# Altium PCB EmphaseMainBoard.PcbDoc (part 1 of 2)
Units mm, origin at the board's own origin, x right, y up, seen from the top; angles counter-clockwise.
Board outline 150 x 110 mm, 2 copper layers (Top Layer, Bottom Layer); 138 components, 156 nets, 586 pads, 141 vias.
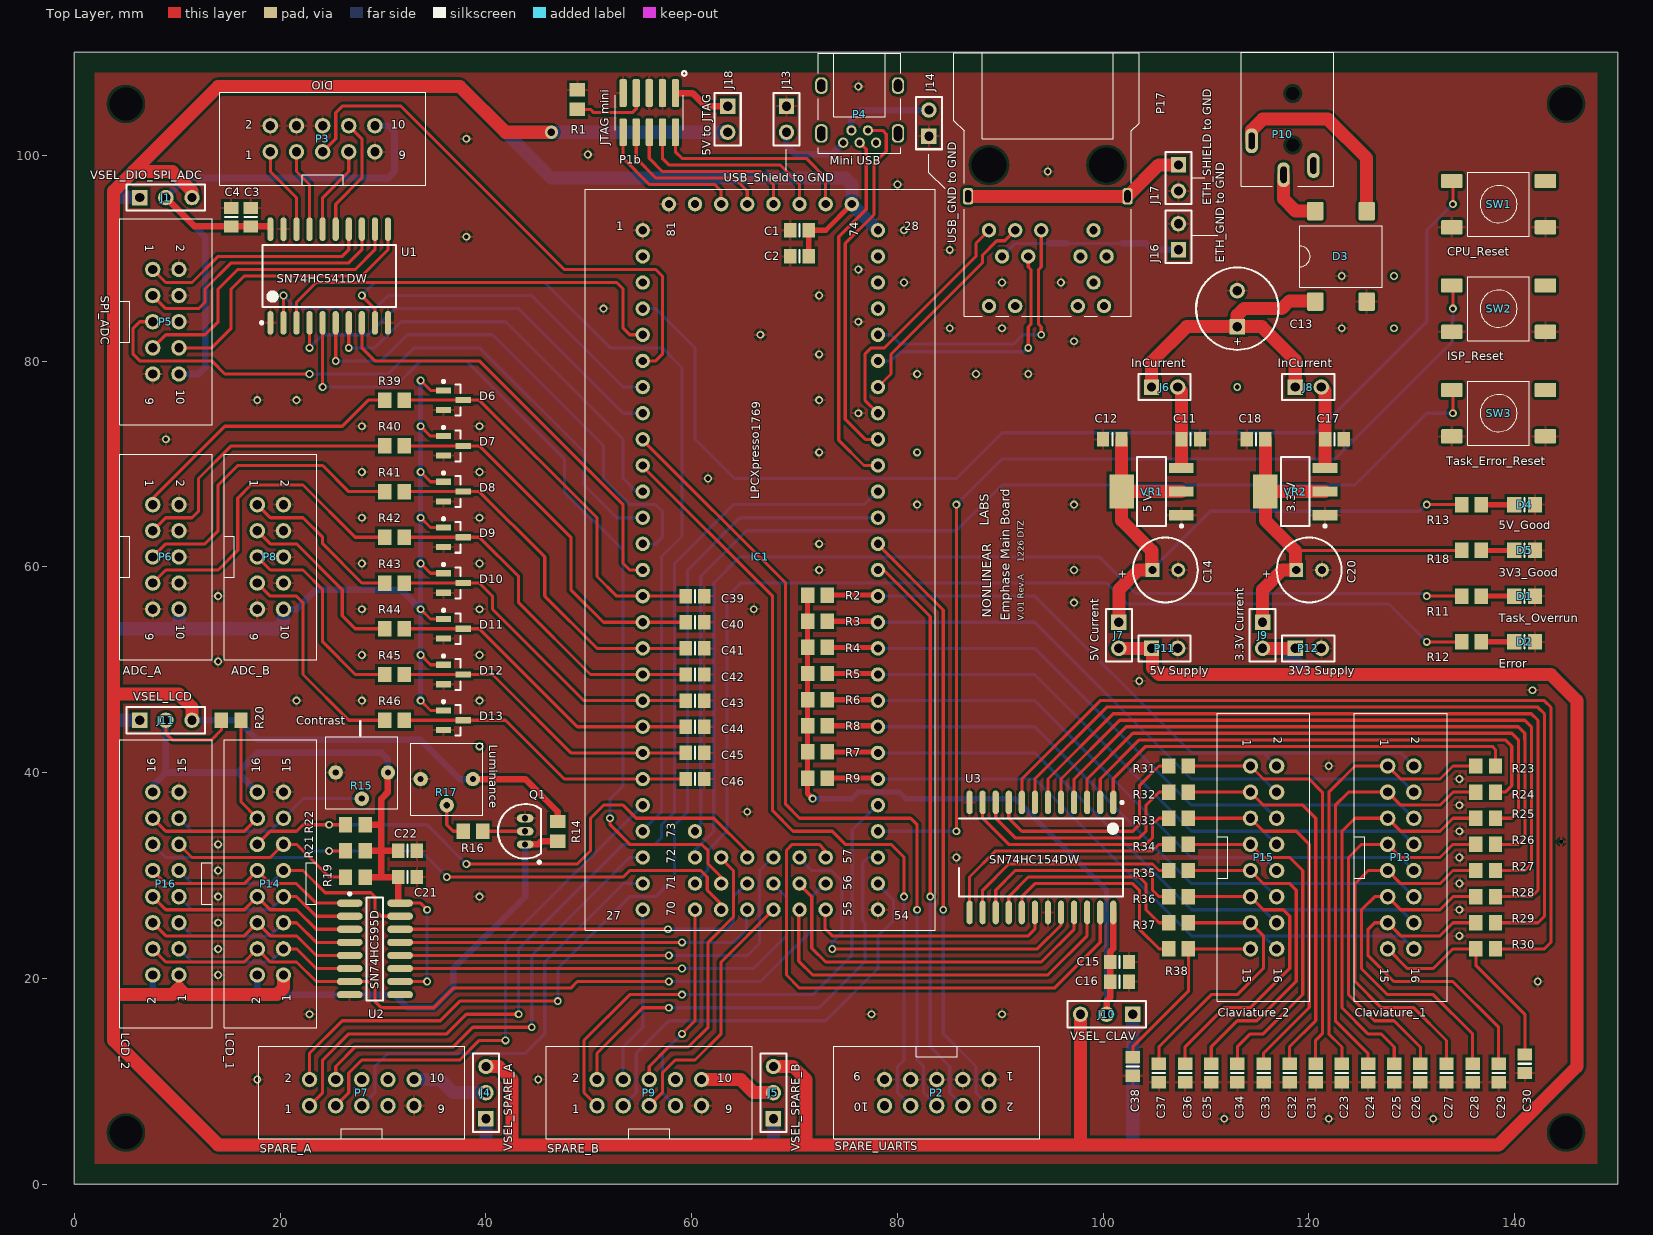
[diagram p0: Top Layer view]
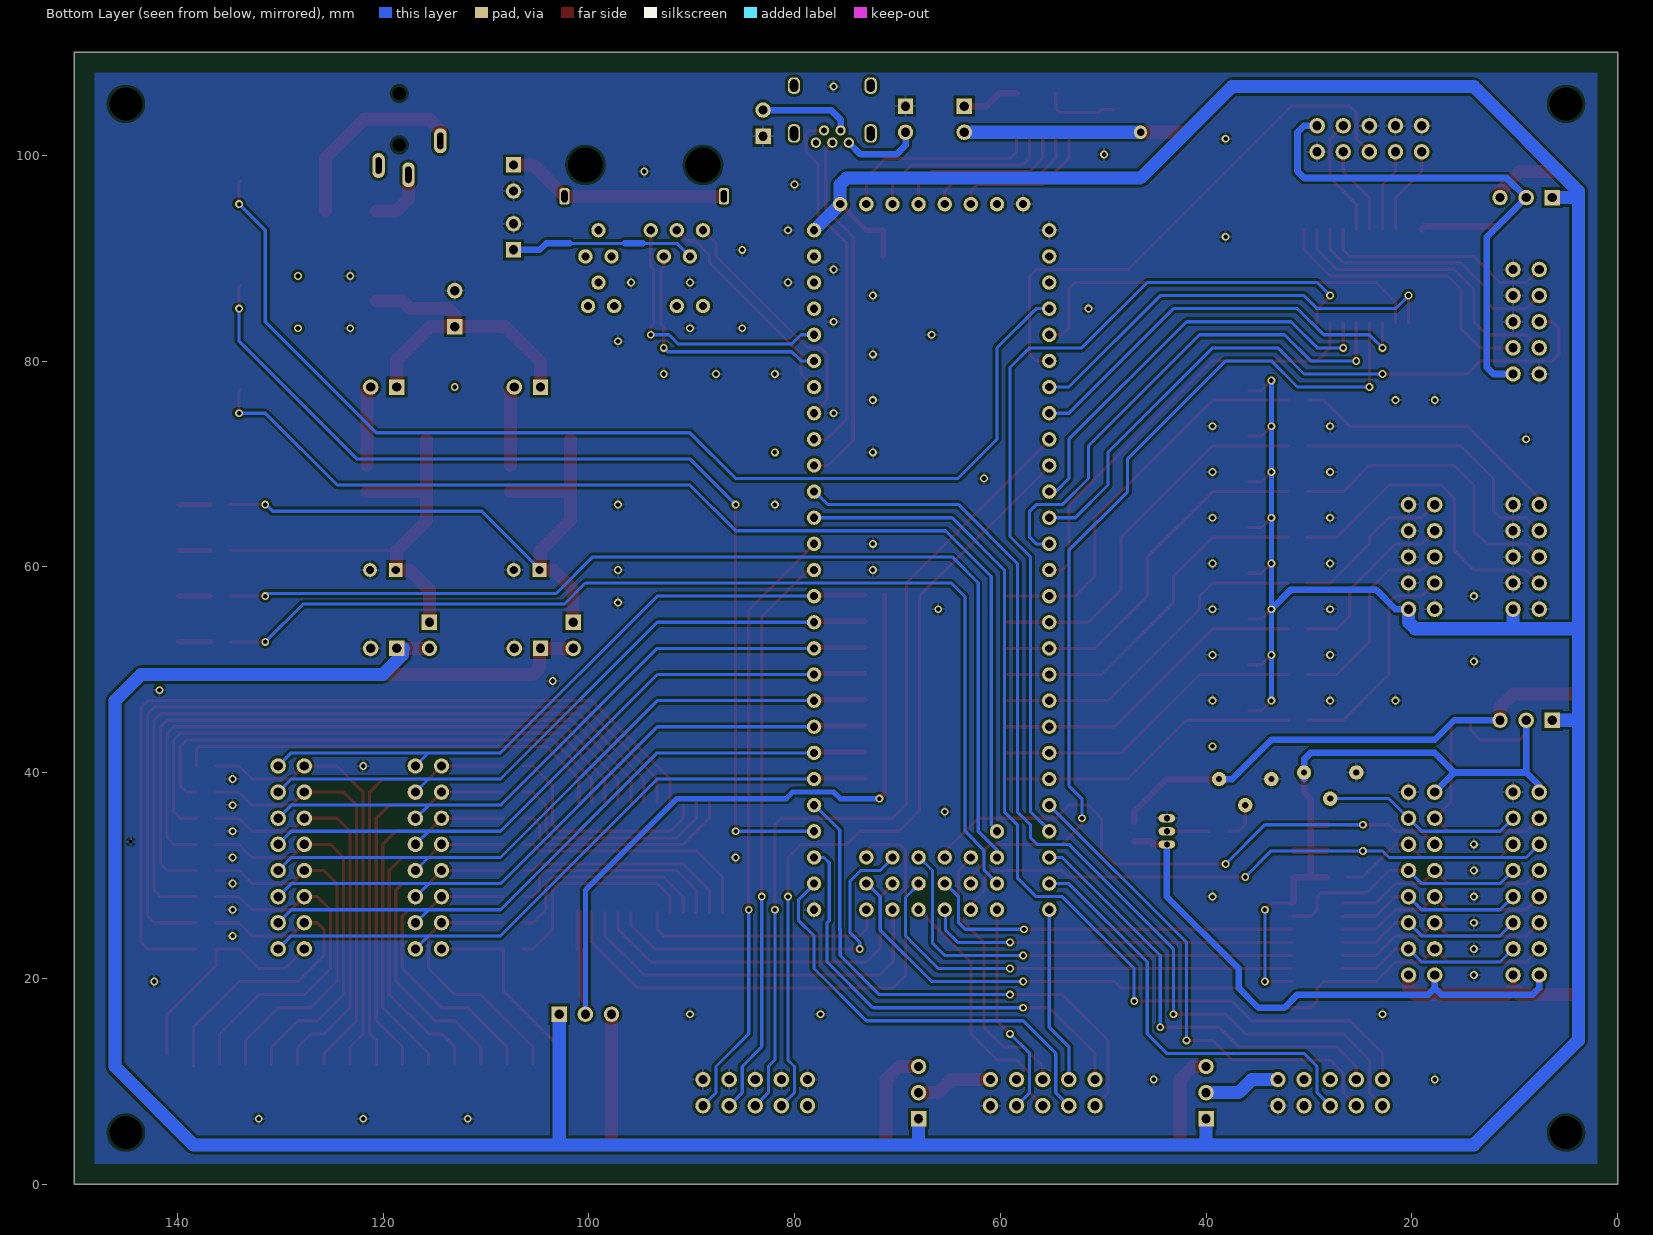
[diagram p1: Bottom Layer view, seen from below]

## Layer stack, top to bottom
Top Layer: signal copper 0.0356
Dielectric: dielectric 0.32, FR-4, Dk 4.8
Bottom Layer: signal copper 0.0356

## Board outline
0,0 0,110 150,110 150,0

## Design rules (kind name [scope] priority, off if disabled: settings)
Clearance [All] p1: gap=0.254
ComponentClearance [All] p1: gap=0.254 collisioncheckmode=3 verticalgap=0.254 showdistances=TRUE
Height [All] p1: minheight=0 maxheight=50 prefheight=12.7
HoleSize [All] p1: absolutevalues=TRUE maxlimit=6 minlimit=0.025 maxpercent=80.000 minpercent=20.000
MinimumSolderMaskSliver [All] p1: minsoldermaskwidth=0.152
PolygonConnect [All] p1: connectstyle=Relief reliefconductorwidth=0.254 reliefentries=4 polygonreliefangle="90 Angle" airgapwidth=0.254
RoutingVias [All] p1: holewidth=0.711 width=1.27 viastyle="Through Hole" minholewidth=0.3 minwidth=0.762 maxholewidth=0.711 maxwidth=1.27
SilkToSilkClearance [All] p1: silktosilkclearance=0.152
SilkscreenOverComponentPads [All] p1: minsilkscreentomaskgap=0.152
SolderMaskExpansion [All] p1: expansion=0.102
Width [All] p1: maxlimit=2.54 minlimit=0.152 preferedwidth=0.254 minimp=50.000000 maximp=50.000000 favimp=50.000000
22 further rules are at their usual default settings.

## Classes and differential pairs
net class ADC_0.[0..7]: ADC_0.0 ADC_0.1 ADC_0.2 ADC_0.3 ADC_0.4 ADC_0.5 ADC_0.6 ADC_0.7
net class LCD_D[0..7]: LCD_D0 LCD_D1 LCD_D2 LCD_D3 LCD_D4 LCD_D5 LCD_D6 LCD_D7

## Components (designator, comment, footprint, x,y, rotation, side; value= is the part's Value field where it differs from the comment)
C1 "Cap Semi" 6-0805_N 70.485,92.71 r0 top
C2 "Cap Pol1" 6-0805_N 70.485,90.17 r180 top
C3 "Cap Semi" 6-0805_N 17.145,93.98 r270 top
C4 "Cap Semi" 6-0805_N 15.24,93.98 r270 top
C11 "Cap Semi" 6-0805_N 108.505,72.39 r180 top
C12 "Cap Semi" 6-0805_N 100.885,72.39 r0 top
C13 "Cap Pol1" CAPPR3.5-8x20 113.03,85.09 r90 top
C14 "Cap Pol1" CAPPR2.5-6.3x11 106.045,59.69 r0 top
C15 "Cap Semi" 6-0805_N 101.6,21.59 r180 top
C16 "Cap Pol1" 6-0805_N 101.6,19.685 r0 top
C17 "Cap Semi" 6-0805_N 122.475,72.39 r180 top
C18 "Cap Semi" 6-0805_N 114.855,72.39 r0 top
C20 "Cap Pol1" CAPPR2.5-6.3x11 120.015,59.69 r0 top
C21 "Cap Semi" 6-0805_N 32.385,29.845 r180 top
C22 "Cap Semi" 6-0805_N 32.385,32.385 r180 top
C23 "Cap Semi" 6-0805_N 123.205,10.795 r90 top
C24 "Cap Semi" 6-0805_N 125.745,10.795 r90 top
C25 "Cap Semi" 6-0805_N 128.285,10.795 r90 top
C26 "Cap Semi" 6-0805_N 130.825,10.795 r90 top
C27 "Cap Semi" 6-0805_N 133.365,10.795 r90 top
C28 "Cap Semi" 6-0805_N 135.905,10.795 r90 top
C29 "Cap Semi" 6-0805_N 138.445,10.795 r90 top
C30 "Cap Semi" 6-0805_N 140.985,11.695 r90 top
C31 "Cap Semi" 6-0805_N 120.665,10.795 r90 top
C32 "Cap Semi" 6-0805_N 118.125,10.795 r90 top
C33 "Cap Semi" 6-0805_N 115.585,10.795 r90 top
C34 "Cap Semi" 6-0805_N 113.045,10.795 r90 top
C35 "Cap Semi" 6-0805_N 110.505,10.795 r90 top
C36 "Cap Semi" 6-0805_N 107.965,10.795 r90 top
C37 "Cap Semi" 6-0805_N 105.41,10.795 r90 top
C38 "Cap Semi" 6-0805_N 102.87,11.43 r90 top
C39 "Cap Semi" 6-0805_N 60.325,57.15 r180 top
C40 "Cap Semi" 6-0805_N 60.325,54.61 r180 top
C41 "Cap Semi" 6-0805_N 60.325,52.07 r180 top
C42 "Cap Semi" 6-0805_N 60.325,49.53 r180 top
C43 "Cap Semi" 6-0805_N 60.325,46.99 r180 top
C44 "Cap Semi" 6-0805_N 60.325,44.45 r180 top
C45 "Cap Semi" 6-0805_N 60.325,41.91 r180 top
C46 "Cap Semi" 6-0805_N 60.325,39.37 r180 top
D1 "Task_Overrun" 6-0805_M 140.97,57.15 r0 top
D2 "Error" 6-0805_M 140.97,52.705 r0 top
D3 "Bridge Rectifier" SDIP 123.11,90.17 r90 top
D4 "5V_Good" 6-0805_M 140.97,66.04 r0 top
D5 "3V3_Good" 6-0805_M 140.97,61.595 r0 top
D6 "Double Diode" SOT23-3N 36.83,76.2 r0 top
D7 "Double Diode" SOT23-3N 36.83,71.755 r0 top
D8 "Double Diode" SOT23-3N 36.83,67.31 r0 top
D9 "Double Diode" SOT23-3N 36.83,62.865 r0 top
D10 "Double Diode" SOT23-3N 36.83,58.42 r0 top
D11 "Double Diode" SOT23-3N 36.83,53.975 r0 top
D12 "Double Diode" SOT23-3N 36.83,49.53 r0 top
D13 "Double Diode" SOT23-3N 36.83,45.085 r0 top
IC1 "" LPCXpresso1769 66.675,59.69 r0 top locked
J1 "VSEL_DIO_SPI_ADC" HDR1X3 6.35,95.885 r0 top
J4 "VSEL_SPARE_A" HDR1X3 40.005,6.35 r90 top
J5 "VSEL_SPARE_B" HDR1X3 67.945,6.35 r90 top
J6 "InCurrent" HDR1X2 104.695,77.47 r0 top
J7 "5V Current" HDR1X2 101.52,54.61 r270 top
J8 "InCurrent" HDR1X2 118.665,77.47 r0 top
J9 "3.3V Current" HDR1X2 115.49,54.61 r270 top
J10 "VSEL_CLAV" HDR1X3 102.87,16.51 r180 top
J11 "VSEL_LCD" HDR1X3 6.35,45.085 r0 top
J13 "USB_Shield to GND" HDR1X2 69.215,104.775 r270 top
J14 "USB_GND to GND" HDR1X2 83.058,101.854 r90 top
J16 "ETH_GND to GND" HDR1X2 107.315,90.805 r90 top
J17 "ETH_SHIELD to GND" HDR1X2 107.315,99.06 r270 top
J18 "5V to JTAG" HDR1X2 63.5,104.775 r270 top
P1b "JTAG mini" "10 pol Header SMD" 55.88,104.14 r180 top
P2 "SPARE_UARTS" "10 pol Header" 83.82,8.89 r180 top
P3 "DIO" "10 pol Header" 24.13,101.6 r0 top
P4 "Mini USB" "Mini USB Socket - Typ B" 76.327,101.219 r0 top
P5 "SPI_ADC" "10 pol Header" 8.89,83.82 r270 top
P6 "ADC_A" "10 pol Header" 8.89,60.96 r270 top
P7 "SPARE_A" "10 pol Header" 27.94,8.89 r0 top
P8 "ADC_B" "10 pol Header" 19.05,60.96 r270 top
P9 "SPARE_B" "10 pol Header" 55.88,8.89 r0 top
P10 "Lumberg Power Con" LumbergPowerCon 118.43,106 r270 top
P11 "5V Supply" HDR1X2 104.695,52.07 r0 top
P12 "3V3 Supply" HDR1X2 118.665,52.07 r0 top
P13 "Claviature_1" "16 pol Header" 128.92,31.75 r270 top
P14 "LCD_1" "16 pol Header" 19.05,29.21 r90 top
P15 "Claviature_2" "16 pol Header" 115.585,31.75 r270 top
P16 "LCD_2" "16 pol Header" 8.89,29.21 r90 top
P17 "Ethernet" "Ethernet RJ-45" 94.615,99.06 r180 top
Q1 "BC337" TO-226-AA 43.815,34.29 r0 top
R1 "Res2" 6-0805 48.895,105.41 r90 top
R2 "Res2" 6-0805 72.215,57.245 r0 top
R3 "Res2" 6-0805 72.215,54.705 r0 top
R4 "Res2" 6-0805 72.215,52.165 r0 top
R5 "Res2" 6-0805 72.215,49.625 r0 top
R6 "Res2" 6-0805 72.215,47.085 r0 top
R7 "Res2" 6-0805 72.215,42.005 r0 top
R8 "Res2" 6-0805 72.215,44.545 r0 top
R9 "Res2" 6-0805 72.215,39.465 r0 top
R11 "Res2" 6-0805 135.81,57.15 r180 top
R12 "Res2" 6-0805 135.81,52.705 r180 top
R13 "Res2" 6-0805 135.81,66.04 r180 top
R14 "Res2" 6-0805 46.99,34.29 r90 top
R15 "Contrast" MiniPot 27.94,37.465 r270 top
R16 "Res2" 6-0805 38.735,34.29 r0 top
R17 "Luminance" MiniPot 36.195,36.83 r270 top
R18 "Res2" 6-0805 135.81,61.595 r180 top
R19 "Res2" 6-0805 27.305,29.845 r180 top
R20 "Res2" 6-0805 15.24,45.085 r0 top
R21 "Res2" 6-0805 27.305,32.385 r180 top
R22 "Res2" 6-0805 27.305,34.925 r180 top
R23 "Res2" 6-0805 137.175,40.64 r0 top
R24 "Res2" 6-0805 137.175,38.1 r0 top
R25 "Res2" 6-0805 137.175,35.56 r0 top
R26 "Res2" 6-0805 137.175,33.02 r0 top
R27 "Res2" 6-0805 137.175,30.48 r0 top
R28 "Res2" 6-0805 137.175,27.94 r0 top
R29 "Res2" 6-0805 137.175,25.4 r0 top
R30 "Res2" 6-0805 137.175,22.86 r0 top
R31 "Res2" 6-0805 107.33,40.64 r180 top
R32 "Res2" 6-0805 107.33,38.1 r180 top
R33 "Res2" 6-0805 107.33,35.56 r180 top
R34 "Res2" 6-0805 107.33,33.02 r180 top
R35 "Res2" 6-0805 107.33,30.48 r180 top
R36 "Res2" 6-0805 107.33,27.94 r180 top
R37 "Res2" 6-0805 107.33,25.4 r180 top
R38 "Res2" 6-0805 107.33,22.86 r180 top
R39 "Res2" 6-0805 31.115,76.2 r180 top
R40 "Res2" 6-0805 31.115,71.755 r180 top
R41 "Res2" 6-0805 31.115,67.31 r180 top
R42 "Res2" 6-0805 31.115,62.865 r180 top
R43 "Res2" 6-0805 31.115,58.42 r180 top
R44 "Res2" 6-0805 31.115,53.975 r180 top
R45 "Res2" 6-0805 31.115,49.53 r180 top
R46 "Res2" 6-0805 31.115,45.085 r180 top
SW1 "CPU_Reset" "SMD Switch" 138.43,95.25 r0 top
SW2 "ISP_Reset" "SMD Switch" 138.43,85.09 r0 top
SW3 "Task_Error_Reset" "SMD Switch" 138.43,74.93 r0 top
U1 "SN74HC541DW" DW020_N 24.765,88.265 r90 top
U2 "SN74HC595D" D016_M 29.21,22.86 r0 top
U3 "SN74HC154DW" SOIC127P1199-24AN 93.995,31.75 r270 top
VR1 "5 V" SOT223-4N 104.695,67.31 r180 top
VR2 "3.3 V" SOT223-4N 118.665,67.31 r180 top

## Footprints (in the part's own frame and the unit in brackets; to place one, negate y for a bottom-side part, rotate by r counter-clockwise, add the part's x,y. Pads: shape width x height; smd on the part's side, far side on the other; paste and mask are expansions set on the pad)
6-0805 [mm] "Chip Resistor; Body 2 x 1.2 mm (LxW typ)"
  rect 1.3x1.5 smd: 1(-0.95,0) 2(0.95,0)
6-0805_M [mm] "Chip Resistor, Body 2.0x1.2mm, IPC Low Density"
  rect 1.4x1.5 smd: 1(-1,0) 2(1,0)
  silkscreen extent 0,-0.65 0,0.65, body extent -1.07,-0.7 1.07,0.7, height 0.7
6-0805_N [mm] "Chip Resistor, Body 2.0x1.2mm, IPC Medium Density"
  rect 1.2x1.4 smd: 1(-0.9,0) 2(0.9,0)
  silkscreen extent 0,-0.6 0,0.6, body extent -1.07,-0.7 1.07,0.7, height 0.7
"10 pol Header" [mm]
  round 1.5 hole 0.9: 1(-5.08,-1.27) 2(-5.08,1.27) 3(-2.54,-1.27) 4(-2.54,1.27) 5(0,-1.27) 6(0,1.27) 7(2.54,-1.27) 8(2.54,1.27) 9(5.08,-1.27) 10(5.08,1.27)
  silkscreen extent -10,-4.5 10,4.5, body extent -10,-4.5 10,4.5, height 9
"10 pol Header SMD" [mm] "50 mil"
  rrect40% 0.7x2.7 smd: 1(-2.54,-1.905) 2(-2.54,1.905) 3(-1.27,-1.905) 4(-1.27,1.905) 5(0,-1.905) 6(0,1.905) 7(1.27,-1.905) 8(1.27,1.905) 9(2.54,-1.905) 10(2.54,1.905)
  silkscreen extent -3.62,-4.03 3.3,1.7
"16 pol Header" [mm]
  round 1.5 hole 0.9: 1(-8.89,-1.27) 2(-8.89,1.27) 3(-6.35,-1.27) 4(-6.35,1.27) 5(-3.81,-1.27) 6(-3.81,1.27) 7(-1.27,-1.27) 8(-1.27,1.27) 9(1.27,-1.27) 10(1.27,1.27) 11(3.81,-1.27) 12(3.81,1.27) 13(6.35,-1.27) 14(6.35,1.27) 15(8.89,-1.27) 16(8.89,1.27)
  silkscreen extent -14,-4.5 14,4.5, body extent -14,-4.5 14,4.5, height 9
CAPPR2.5-6.3x11 [mm] "Capacitor, Electrolytic, Radial; Body 6.3 x 11 mm (Dia.xH typ); Pin Spacing 2.5 mm (typ)"
  rect 1.35x1.35 hole 0.8: 1(-1.25,0)
  round 1.35 hole 0.8: 2(1.25,0)
  silkscreen extent -3.15,-3.15 3.15,3.15
CAPPR3.5-8x20 [mm] "Capacitor, Electrolytic, Radial; Body 8 x 20 mm (Dia.xH typ); Pin Spacing 3.5 mm (typ)"
  rect 1.5x1.5 hole 0.9: 1(-1.75,0)
  round 1.5 hole 0.9: 2(1.75,0)
  silkscreen extent -4,-4 4,4
D016_M [mm] "SOIC, 16-Leads, Body 9.9x3.9mm, Pitch 1.27mm, IPC Low Density"
  oval 2.5x0.7 smd: 1(-2.45,4.445) 2(-2.45,3.175) 3(-2.45,1.905) 4(-2.45,0.635) 5(-2.45,-0.635) 6(-2.45,-1.905) 7(-2.45,-3.175) 8(-2.45,-4.445) 9(2.45,-4.445) 10(2.45,-3.175) 11(2.45,-1.905) 12(2.45,-0.635) 13(2.45,0.635) 14(2.45,1.905) 15(2.45,3.175) 16(2.45,4.445)
  silkscreen extent -2.57,-5 0.8,5.47, body extent -2,-5 2,5, height 1.75
DW020_N [mm] "SOIC, 20-Leads, Body 12.8x7.5mm, Pitch 1.27mm, IPC Medium Density"
  oval 2.3x0.6 smd: 1(-4.55,5.715) 2(-4.55,4.445) 3(-4.55,3.175) 4(-4.55,1.905) 5(-4.55,0.635) 6(-4.55,-0.635) 7(-4.55,-1.905) 8(-4.55,-3.175) 9(-4.55,-4.445) 10(-4.55,-5.715) 11(4.55,-5.715) 12(4.55,-4.445) 13(4.55,-3.175) 14(4.55,-1.905) 15(4.55,-0.635) 16(4.55,0.635) 17(4.55,1.905) 18(4.55,3.175) 19(4.55,4.445) 20(4.55,5.715)
  silkscreen extent -4.67,-6.5 3,6.69, body extent -3.75,-6.5 3.75,6.5, height 2.65
"Ethernet RJ-45" [mm] "Bel Stewart MagJack"
  rrect40% 0x0 hole 3.4: 0(-5.715,0) 0(5.715,0)
  round 1.4 hole 0.8: 1(5.715,6.35) 2(4.445,8.89) 3(3.175,6.35) 4(1.905,8.89) 5(0.635,6.35) 6(5.715,13.716) 7(3.175,13.716) 8(-3.175,8.89) 9(-4.445,6.35) 10(-5.715,8.89) 11(-4.445,11.43) 12(-2.921,13.716) 13(-5.461,13.716)
  rrect50% 1x1.6 hole 0.6 slot 1.2 at 90 deg: 14(-7.747,3.048) 14(7.747,3.048)
  silkscreen extent -8.89,-10.92 9.14,14.73
HDR1X2 [mm] "Connector; Header; 2 Position"
  rect 1.5x1.5 hole 0.9: 1(0,0)
  round 1.5 hole 0.9: 2(2.54,0)
  silkscreen extent -1.27,-1.27 3.81,1.27
HDR1X3 [mm] "Connector; Header; 3 Position"
  rect 1.5x1.5 hole 0.9: 1(0,0)
  round 1.5 hole 0.9: 2(2.54,0) 3(5.08,0)
  silkscreen extent -1.27,-1.27 6.35,1.27
LPCXpresso1769 [mm]
  round 1.4 hole 0.8: 1(-11.43,33.02) 2(-11.43,30.48) 3(-11.43,27.94) 4(-11.43,25.4) 5(-11.43,22.86) 6(-11.43,20.32) 7(-11.43,17.78) 8(-11.43,15.24) 9(-11.43,12.7) 10(-11.43,10.16) 11(-11.43,7.62) 12(-11.43,5.08) 13(-11.43,2.54) 14(-11.43,0) 15(-11.43,-2.54) 16(-11.43,-5.08) 17(-11.43,-7.62) 18(-11.43,-10.16) 19(-11.43,-12.7) 20(-11.43,-15.24) 21(-11.43,-17.78) 22(-11.43,-20.32) 23(-11.43,-25.4) 24(-11.43,-22.86) 25(-11.43,-27.94) 26(-11.43,-30.48) 27(-11.43,-33.02) 28(11.43,33.02) 29(11.43,30.48) 30(11.43,27.94) 31(11.43,25.4) 32(11.43,22.86) 33(11.43,20.32) 34(11.43,17.78) 35(11.43,15.24) 36(11.43,12.7) 37(11.43,10.16) 38(11.43,7.62) 39(11.43,5.08) 40(11.43,2.54) 41(11.43,0) 42(11.43,-2.54) 43(11.43,-5.08) 44(11.43,-7.62) 45(11.43,-10.16) 46(11.43,-12.7) 47(11.43,-15.24) 48(11.43,-17.78) 49(11.43,-20.32) 50(11.43,-22.86) 51(11.43,-25.4) 52(11.43,-27.94) 53(11.43,-30.48) 54(11.43,-33.02) 55(6.35,-33.02) 56(6.35,-30.48) 57(6.35,-27.94) 58(3.81,-33.02) 59(3.81,-30.48) 60(3.81,-27.94) 61(1.27,-33.02) 62(1.27,-30.48) 63(1.27,-27.94) 64(-1.27,-33.02) 65(-1.27,-30.48) 66(-1.27,-27.94) 67(-3.81,-33.02) 68(-3.81,-30.48) 69(-3.81,-27.94) 70(-6.35,-33.02) 71(-6.35,-30.48) 72(-6.35,-27.94) 73(-6.35,-25.4) 74(8.89,35.56) 75(6.35,35.56) 76(3.81,35.56) 77(1.27,35.56) 78(-1.27,35.56) 79(-3.81,35.56) 80(-6.35,35.56) 81(-8.89,35.56)
  silkscreen extent -17,-35 17,37
LumbergPowerCon [mm]
  round 0 hole 1.3: 0(0,0) 0(5,0)
  rrect90% 2.4x1.2 hole 0.6 slot 1.6 at 0 deg: 1(7.9,-0.9) 2(4.6,-4) 3(7,2)
  silkscreen extent -4,-5 9,4
"Mini USB Socket - Typ B" [mm]
  rrect80% 1.2x1.8 hole 0.8 slot 1.4 at 90 deg: 0(-3.725,0.9) 0(3.725,0.9)
  rrect80% 1.2x1.6 hole 0.8 slot 1.2 at 90 deg: 0(-3.725,5.55) 0(3.725,5.55)
  round 1 hole 0.6: 1(1.6,0) 2(0.8,1.2) 3(0,0) 4(-0.8,1.2) 5(-1.6,0)
  silkscreen extent -4,-1 4,8.7
MiniPot [mm]
  round 1.4 hole 0.6: CCW(-2.54,-2.54) CW(-2.54,2.54) W(0,0)
  silkscreen extent -6,-3.5 1,3.5
SDIP [mm]
  rrect20% 1.8x1.6 smd: 1(-4.4,2.5) 2(-4.4,-2.5) 3(4.4,-2.5) 4(4.4,2.5)
  silkscreen extent -3,-4 3,4
"SMD Switch" [mm]
  rrect20% 2.1x1.4 smd: 1(-4.55,2.25) 2(4.55,2.25) 3(-4.55,-2.25) 4(4.55,-2.25)
  silkscreen extent -3,-3.1 3,3.1
SOIC127P1199-24AN [mm] "SOIC, 24-Leads, Body 15.8x9mm, Pitch 1.27mm, IPC Medium Density"
  oval 2.3x0.6 smd: 1(-5.35,6.985) 2(-5.35,5.715) 3(-5.35,4.445) 4(-5.35,3.175) 5(-5.35,1.905) 6(-5.35,0.635) 7(-5.35,-0.635) 8(-5.35,-1.905) 9(-5.35,-3.175) 10(-5.35,-4.445) 11(-5.35,-5.715) 12(-5.35,-6.985) 13(5.35,-6.985) 14(5.35,-5.715) 15(5.35,-4.445) 16(5.35,-3.175) 17(5.35,-1.905) 18(5.35,-0.635) 19(5.35,0.635) 20(5.35,1.905) 21(5.35,3.175) 22(5.35,4.445) 23(5.35,5.715) 24(5.35,6.985)
  silkscreen extent -5.47,-8.02 3.8,7.96, body extent -4.51,-8.05 4.51,8.05, height 2.5
SOT23-3N [mm] "SOT23, 3-Leads, Body 2.9x1.3mm, Pitch 0.95mm, Lead Span 2.5mm, IPC Medium Density"
  rect 1.5x0.6 smd: 1(-0.95,0.95) 2(-0.95,-0.95) 3(0.95,0)
  silkscreen extent -1.07,-1.5 0.7,1.92, body extent -0.7,-1.5 0.7,1.5, height 1.1
SOT223-4N [mm] "SOT223, 4-Leads, Body 6.5x3.5mm, Pitch 2.3mm, Lead Span 7mm, IPC Medium Density"
  rect 2.4x1 smd: 1(-2.9,2.3) 2(-2.9,0) 3(-2.9,-2.3)
  rect 2.4x3.3 smd: 4(2.9,0)
  silkscreen extent -3.03,-3.35 1.4,3.47, body extent -1.85,-3.35 1.85,3.35, height 1.8
TO-226-AA [mm] "TO, Flat Index; 3 In-Line, Axial Leads; Body Dia. 4.8mm; Leads 0.55 x 0.51 mm (max)"
  oval 1.6x0.8 hole 0.6: 1(0,-1.27) 2(0,0) 3(0,1.27)
  silkscreen extent -2.65,-3.13 1.52,2.65, body extent -2.66,-2.66 1.52,2.66, height 5.33

## Part data
C1 C3 C4 C11 C12 C15 C17 C18 C21 C22 C23 C24 C25 C26 C27 C28 C29 C30 C31 C32 C33 C34 C35 C36 C37 C38 C39 C40 C41 C42 C43 C44 C45 C46: "Capacitor (Semiconductor SIM Model)"
C2 C13 C14 C16 C20: "Polarized Capacitor (Radial)"
D1 D2 D4 D5: library part LED3, "Typical BLUE SiC LED"
D3: library part "Bridge Rectifiers"
D6 D7 D8 D9 D10 D11 D12 D13: "High Speed Double Diode"
IC1: library part Component_1, "Capacitor (Semiconductor SIM Model)"
J1 J4 J5 J10 J11: library part "Header 3", "Header, 3-Pin"
J6 J7 J8 J9 J13 J14 J16 J17 J18 P11 P12: library part "Header 2", "Header, 2-Pin"
P1b: library part "10 pol Header", "JTAG"
P2 P3 P5 P6 P7 P8 P9: library part "10 pol Header", "10 pol Header"
P4: library part "Mini USB Jack B"
P10: library part "Lumberg Power Connector", "Lumberg Power Connector"
P13 P14 P15 P16: library part "16 pol Header", "16 pol Header"
P17: library part "Ethernet Jack", "Bel Stewart - MagJack 10/100 RJ-45 Ethernet"
Q1: library part NPN, "NPN Bipolar Transistor"
R1 R2 R3 R4 R5 R6 R7 R8 R9 R11 R12 R13 R14 R16 R18 R19 R20 R21 R22 R23 R24 R25 R26 R27 R28 R29 R30 R31 R32 R33 R34 R35 R36 R37 R38 R39 R40 R41 R42 R43 R44 R45 R46: "Resistor"
R15 R17: library part "RPot SM", "Square Trimming Potentiometer"
SW1 SW2 SW3: library part "Generic SMD Switch"
U1: "Octal Buffer/Driver with 3-State Outputs"
U2: "8-Bit Shift Register with 3-State Output Registers"
U3: "4-Line to 16-Line Decoder / Demultiplexer"
VR1 VR2: library part "Voltage Regulator"

## Free pads (board coordinates)
  round 0 hole 3.2: 0(5,5) 0(5,105) 0(145,5) 0(145,105)

## Via types
v1: diameter 0.762, hole 0.457, Top Layer to Bottom Layer, 139 vias
v2: diameter 1.27, hole 0.762, Top Layer to Bottom Layer, 1 vias
v3: diameter 0.457, hole 0.457, Top Layer to Bottom Layer, 1 vias

## Nets (pads, with @x,y where several pads share a name; then routed paths per layer and width w, separated by ;. In a path a pad name is that pad's centre, name@x,y a point inside that pad or via, vN(x,y) a via of type N, cw(c..) or ccw(c..) an arc to the next point about the centre after c; other vN are vias at no path point)
3V3: C1.2 C2.1 D6.1 D7.1 D8.1 D9.1 D10.1 D11.1 D12.1 D13.1 IC1.28 IC1.74 J1.1 J4.1 J5.1 J9.2 J10.1 J11.1 P6.10 P8.10 P12.1 | length 503.3
  Top Layer w0.305: v1(33.655,46.99) 34.61,46.035 D13.1@35.88,46.035 ; v1(33.655,51.435) 34.61,50.48 D12.1@35.88,50.48 ; v1(33.655,55.88) 34.61,54.925 D11.1@35.88,54.925 ; v1(33.655,60.325) 34.61,59.37 D10.1@35.88,59.37 ; v1(33.655,64.77) 34.61,63.815 D9.1@35.88,63.815 ; v1(33.655,69.215) 34.61,68.26 D8.1@35.88,68.26 ; v1(33.655,73.66) 34.61,72.705 D7.1@35.88,72.705 ; v1(33.655,78.105) 34.61,77.15 D6.1@35.88,77.15
  Top Layer w0.508: C2.1@71.385,90.17 C1.2@71.385,92.71 73.025,92.71 IC1.74@75.565,95.25
  Top Layer w1.27: J9.2@115.49,52.07 P12.1@118.03,52.07
  Bottom Layer w0.508: v1(33.655,46.99) v1(33.655,51.435) v1(33.655,55.88) v1(33.655,60.325) v1(33.655,64.77) v1(33.655,69.215) v1(33.655,73.66) v1(33.655,78.105)
  Bottom Layer w0.635: P8.10@20.32,55.88 21.59,55.88 23.495,57.785 31.75,57.785 v1(33.655,55.88)
  Bottom Layer w1.27: J11.1@6.35,45.085 3.81,45.085 ; J1.1@6.35,95.885 4.445,95.885 3.81,96.52 ; 10.16,54.61 P6.10@10.16,55.88 ; P8.10@20.32,55.88 20.32,54.61 19.685,53.975 3.81,53.975 ; J4.1@40.005,6.35 40.005,3.81 ; J5.1@67.945,6.35 67.945,3.81 ; IC1.28@78.105,92.71 IC1.74@75.565,95.25 75.565,97.155 74.93,97.79 46.355,97.79 37.465,106.68 13.97,106.68 3.81,96.52 ; J10.1@102.87,16.51 102.87,3.81 ; P12.1@118.03,52.07 118.11,51.99 118.11,51.435 120.015,49.53 143.51,49.53 146.05,46.99 146.05,11.43 138.43,3.81 102.87,3.81 ; 3.81,45.085 3.81,13.97 13.97,3.81 40.005,3.81 ; 3.81,45.085 3.81,53.975 ; 3.81,53.975 3.81,96.52 ; 40.005,3.81 67.945,3.81 ; 67.945,3.81 102.87,3.81
5V: J1.3 J4.3 J5.3 J7.2 J10.3 J11.3 J18.2 P11.1 P14.1 P16.1 R14.2 R17.CW | length 488.1
  Top Layer w0.635: R17.CW@38.735,39.37 43.815,39.37 46.99,36.195 R14.2@46.99,35.24
  Top Layer w1.27: J11.3@11.43,45.085 11.43,46.355 10.16,47.625 3.81,47.625 ; J1.3@11.43,95.885 11.43,96.52 9.525,98.425 5.715,98.425 ; P14.1@20.32,20.32 20.32,19.05 19.685,18.415 10.795,18.415 10.16,19.05 9.525,18.415 3.81,18.415 ; J4.3@40.005,11.43 41.275,11.43 42.545,10.16 42.545,3.81 ; v2(46.355,102.235) 41.91,102.235 37.465,106.68 13.97,106.68 5.715,98.425 ; J5.3@67.945,11.43 69.85,11.43 71.12,10.16 71.12,3.81 ; J10.3@97.79,16.51 97.79,3.81 ; J7.2@101.52,52.07 P11.1@104.695,52.07 104.775,52.07 104.775,50.165 105.41,49.53 143.51,49.53 146.05,46.99 146.05,11.43 138.43,3.81 97.79,3.81 ; 3.81,18.415 3.81,13.97 13.97,3.81 42.545,3.81 ; 3.81,18.415 3.81,47.625 ; 3.81,47.625 3.81,96.52 5.715,98.425 ; 42.545,3.81 71.12,3.81 ; 71.12,3.81 97.79,3.81
  Bottom Layer w0.635: J11.3@11.43,45.085 15.875,45.085 17.78,43.18 33.655,43.18 37.465,39.37 R17.CW@38.1,39.37
  Bottom Layer w1.27: v2(46.355,102.235) J18.2@63.5,102.235
ADC_0.0: C39.2 D6.3 IC1.15 R39.1 | length 38.6
  Top Layer w0.305: R39.1@32.065,76.2 D6.3@37.78,76.2 39.37,76.2 50.8,64.77 50.8,59.055 52.705,57.15 C39.2@59.425,57.15
ADC_0.0_IN: P6.1 R39.2 | length 27.1
  Top Layer w0.305: P6.1@7.62,66.04 7.62,66.675 14.605,73.66 26.035,73.66 28.575,76.2 R39.2@30.165,76.2
ADC_0.1: C40.2 D7.3 IC1.16 R40.1 | length 37.4
  Top Layer w0.305: R40.1@32.065,71.755 D7.3@37.78,71.755 39.37,71.755 48.26,62.865 48.26,57.785 51.435,54.61 IC1.16@55.245,54.61 C40.2@59.425,54.61
ADC_0.1_IN: P6.3 R40.2 | length 27.8
  Top Layer w0.305: P6.3@7.62,63.5 8.89,64.77 11.43,64.77 12.065,65.405 12.065,68.58 15.24,71.755 R40.2@30.165,71.755
ADC_0.2: C41.2 D8.3 IC1.17 R41.1 | length 35.9
  Top Layer w0.305: R41.1@32.065,67.31 D8.3@37.78,67.31 39.37,67.31 45.72,60.96 45.72,57.15 50.8,52.07 53.34,52.07 C41.2@59.425,52.07
ADC_0.2_IN: P6.5 R41.2 | length 29.9
  Top Layer w0.305: P6.5@7.62,60.96 8.89,62.23 12.7,62.23 13.97,63.5 13.97,67.945 15.875,69.85 24.13,69.85 26.67,67.31 R41.2@30.165,67.31
ADC_0.3: C42.2 D9.3 IC1.18 R42.1 | length 34.4
  Top Layer w0.305: R42.1@32.065,62.865 D9.3@37.78,62.865 39.37,62.865 43.18,59.055 43.18,56.515 50.165,49.53 IC1.18@55.245,49.53 C42.2@59.425,49.53
ADC_0.3_IN: P6.7 R42.2 | length 31.6
  Top Layer w0.305: P6.7@7.62,58.42 8.89,59.69 13.97,59.69 15.875,61.595 15.875,66.675 17.145,67.945 22.225,67.945 27.305,62.865 R42.2@30.165,62.865
ADC_0.4: C43.2 D10.3 IC1.19 R43.1 | length 32.8
  Top Layer w0.305: R43.1@32.065,58.42 D10.3@37.78,58.42 39.37,58.42 40.64,57.15 40.64,55.88 49.53,46.99 IC1.19@55.245,46.99 C43.2@59.425,46.99
ADC_0.4_IN: P8.1 R43.2 | length 15.9
  Top Layer w0.305: P8.1@17.78,66.04 19.05,64.77 22.225,64.77 24.13,62.865 24.13,62.23 27.94,58.42 R43.2@30.165,58.42
ADC_0.5: C44.2 D11.3 IC1.20 R44.1 | length 31.3
  Top Layer w0.305: R44.1@32.065,53.975 D11.3@37.78,53.975 39.37,53.975 48.895,44.45 IC1.20@55.245,44.45 C44.2@59.425,44.45
ADC_0.5_IN: P8.3 R44.2 | length 17.8
  Top Layer w0.305: P8.3@17.78,63.5 19.05,62.23 21.59,62.23 26.035,57.785 26.035,55.245 27.305,53.975 R44.2@30.165,53.975
ADC_0.6: C45.2 D12.3 IC1.21 R45.1 | length 30.5
  Top Layer w0.305: R45.1@32.065,49.53 D12.3@37.78,49.53 40.64,49.53 48.26,41.91 53.34,41.91 C45.2@59.425,41.91
ADC_0.6_IN: P8.5 R45.2 | length 20.1
  Top Layer w0.305: P8.5@17.78,60.96 19.05,59.69 22.225,59.69 24.13,57.785 24.13,52.705 27.305,49.53 R45.2@30.165,49.53
ADC_0.7: C46.2 D13.3 IC1.22 R46.1 | length 29.7
  Top Layer w0.305: R46.1@32.065,45.085 D13.3@37.78,45.085 41.91,45.085 47.625,39.37 IC1.22@55.245,39.37 C46.2@59.425,39.37
ADC_0.7_IN: P8.7 R46.2 | length 22
  Top Layer w0.305: P8.7@17.78,58.42 19.05,57.15 21.59,57.15 22.225,56.515 22.225,49.53 26.67,45.085 R46.2@30.165,45.085
DIO_CL: P3.1 U1.18 | length 8.6
  Top Layer w0.305: P3.1@19.05,100.33 19.05,98.425 21.59,95.885 U1.18@21.59,92.815
DIO_CL_A: IC1.7 U1.2 | length 42.3
  Top Layer w0.305: U1.2@20.32,83.715 v1(20.32,86.36)
  Bottom Layer w0.305: v1(20.32,86.36) 21.59,85.09 29.21,85.09 30.48,86.36 44.45,86.36 53.34,77.47 IC1.7@55.245,77.47
DIO_ID: IC1.6 P3.5 | length 53
  Top Layer w0.305: P3.5@24.13,100.33 25.4,101.6 25.4,104.14 26.035,104.775 31.75,104.775 47.625,88.9 56.515,88.9 57.15,88.265 57.15,80.645 56.515,80.01 IC1.6@55.245,80.01
DIO_IG: P3.8 U1.15 | length 11.6
  Top Layer w0.305: U1.15@25.4,92.815 25.4,95.25 27.94,97.79 27.94,101.6 P3.8@26.67,102.87
DIO_IG_A: IC1.68 U1.5 | length 87.5
  Top Layer w0.305: v1(24.13,77.47) U1.5@24.13,83.715 ; v1(52.07,35.56) 52.07,34.925 53.975,33.02 60.96,33.02 61.595,32.385 61.595,31.115 62.865,29.845 IC1.68@62.865,29.21
  Bottom Layer w0.305: v1(24.13,77.47) 31.115,77.47 33.655,80.01 38.1,80.01 47.625,70.485 47.625,67.31 53.34,61.595 53.34,38.735 52.07,37.465 v1(52.07,35.56)
DIO_OD: P3.3 U1.17 | length 8
  Top Layer w0.305: P3.3@21.59,100.33 21.59,98.425 22.86,97.155 U1.17@22.86,92.815
DIO_OD_A: IC1.5 U1.3 | length 40.8
  Top Layer w0.305: U1.3@21.59,83.715 21.59,85.725 23.495,87.63 52.705,87.63 53.34,86.995 53.34,83.185 53.975,82.55 IC1.5@55.245,82.55
DIO_OS: P3.7 U1.16 | length 8.6
  Top Layer w0.305: U1.16@24.13,92.815 24.13,95.885 26.67,98.425 P3.7@26.67,100.33
DIO_OS_A: IC1.8 U1.4 | length 40.7
  Top Layer w0.305: v1@22.86,81.228 v1(22.86,81.28) U1.4@22.86,83.715
  Bottom Layer w0.305: v1(22.86,81.28) 24.13,82.55 28.575,82.55 31.115,85.09 43.18,85.09 53.34,74.93 IC1.8@55.245,74.93
ETH_RD_N: IC1.32 P17.5 | length 27.1
  Top Layer w0.305: v1(93.98,82.55) 93.98,83.312 93.726,83.566 93.726,88.9 93.98,89.154 P17.5@93.98,92.71
  Bottom Layer w0.305: IC1.32@78.025,82.55 IC1.32@78.105,82.55 79.375,82.55 80.264,81.661 91.313,81.661 92.202,82.55 v1(93.98,82.55)
ETH_RD_P: IC1.33 P17.4 | length 24.3
  Top Layer w0.305: v1(92.71,81.28) 92.71,83.312 92.964,83.566 92.964,88.9 92.71,89.154 P17.4@92.71,90.17
  Bottom Layer w0.305: IC1.33@78.025,80.01 IC1.33@78.105,80.01 79.375,80.01 80.264,80.899 92.329,80.899 v1(92.71,81.28)
ETH_TD_N: IC1.34 P17.3 | length 21.2
  Top Layer w0.305: IC1.34@78.105,77.47 79.375,78.74 79.375,80.645 88.265,89.535 88.265,90.297 89.662,91.694 90.424,91.694 P17.3@91.44,92.71
ETH_TD_P: IC1.35 P17.1 | length 24
  Top Layer w0.305: IC1.35@78.105,74.93 76.835,76.2 76.835,80.645 77.47,81.28 78.74,81.28 87.63,90.17 87.63,91.44 P17.1@88.9,92.71
GND: C1.1 C2.2 C3.1 C4.1 C11.1 C12.1 C13.2 C14.2 C15.1 C16.2 C17.1 C18.1 C20.2 C21.1 C22.1 C23.1 C24.1 C25.1 C26.1 C27.1 C28.1 C29.1 C30.1 C31.1 C32.1 C33.1 C34.1 C35.1 C36.1 C37.1 C38.1 C39.1 C40.1 C41.1 C42.1 C43.1 C44.1 C45.1 C46.1 D1.2 D2.2 D3.2 D4.2 D5.2 D6.2 D7.2 D8.2 D9.2 D10.2 D11.2 D12.2 D13.2 IC1.1 IC1.54 IC1.81 J13.1 J14.1 J16.2 J17.2 P1b.3 P1b.5 P1b.9 P2.1 P2.3 P2.5 P2.7 P2.9 P3.2 P3.4 P3.6 P3.9 P5.2 P5.4 P5.6 P5.9 P6.2 P6.4 P6.6 P6.8 P6.9 P7.9 P8.2 P8.4 P8.6 P8.8 P8.9 P9.9 P11.2 P12.2 P14.15 P16.15 Q1.3 R1.2 R15.CCW R17.CCW SW1.3 SW1.4 SW2.3 SW2.4 SW3.3 SW3.4 U1.1 U1.10 U1.19 U2.8 U3.12 U3.19 VR1.1 VR2.1
  other v1: 111.76,6.35 121.92,6.35 132.08,6.35 17.78,10.16 45.085,10.16 22.86,16.51 77.47,16.51 90.17,16.51 142.24,19.685 13.97,20.32 13.97,22.86 134.62,24.13 13.97,25.4 134.62,26.67 13.97,27.94 39.37,27.94 134.62,29.21 13.97,30.48 85.725,31.75 134.62,31.75 13.97,33.02 134.62,34.29 65.405,36.195 134.62,36.83 134.62,39.37 121.92,40.64 21.59,46.99 27.94,46.99 39.37,46.99 141.732,48.006 103.505,48.895 13.97,50.8 27.94,51.435 39.37,51.435 27.94,55.88 39.37,55.88 66.04,55.88 97.155,56.515 13.97,57.15 72.39,59.69 97.155,59.69 27.94,60.325 39.37,60.325 72.39,62.23 27.94,64.77 39.37,64.77 81.915,66.04 97.155,66.04 61.595,68.58 27.94,69.215 39.37,69.215 72.39,71.12 8.89,72.39 27.94,73.66 39.37,73.66 76.2,74.93 17.78,76.2 21.59,76.2 72.39,76.2 81.915,78.74 87.63,78.74 92.71,78.74 72.39,80.645 97.155,81.915 66.675,82.55 85.09,83.185 90.17,83.185 123.19,83.185 76.2,83.82 51.435,85.09 72.39,86.36 80.645,87.63 90.17,87.63 95.885,87.63 123.19,88.265 76.2,88.9 85.09,90.805 38.1,92.075 80.645,92.71 80.01,97.155 94.615,98.425 49.911,100.076 38.1,101.6 76.2,106.68
  other v3: 144.526,33.274
JTAG_RST: IC1.79 P1b.10 | length 14.7
  Top Layer w0.305: P1b.10@53.34,102.235 53.34,99.695 55.88,97.155 62.23,97.155 62.865,96.52 IC1.79@62.865,95.25
JTAG_RTCK: P1b.7 R1.1 | length 7.5
  Top Layer w0.305: R1.1@48.895,104.46 50.16,104.46 50.48,104.14 54.229,104.14 54.61,104.521 P1b.7@54.61,106.045
JTAG_TDI: IC1.78 P1b.8 | length 15.9
  Top Layer w0.305: P1b.8@54.61,102.235 54.61,99.695 56.515,97.79 64.135,97.79 65.405,96.52 IC1.78@65.405,95.25
JTAG_TDO: IC1.77 P1b.6 | length 17.6
  Top Layer w0.305: P1b.6@55.88,102.235 55.88,99.695 57.15,98.425 66.675,98.425 67.945,97.155 IC1.77@67.945,95.25
JTAG_TMS: IC1.75 P1b.2 | length 20.1
  Top Layer w0.305: P1b.2@58.42,102.235 58.42,100.33 59.055,99.695 71.12,99.695 73.025,97.79 IC1.75@73.025,95.25
KEY_0: IC1.42 P13.2 P15.2 R2.2 | length 65.6
  Top Layer w0.508: R2.2@73.165,57.245 IC1.42@77.93,57.245
  Bottom Layer w0.305: IC1.42@78.025,57.15 IC1.42@78.105,57.15 93.345,57.15 108.585,41.91 115.585,41.91 ; P15.2@116.855,40.64 115.585,41.91 ; P13.2@130.19,40.64 128.92,41.91 115.585,41.91
KEY_1: IC1.43 P13.4 P15.4 R3.2 | length 65.5
  Top Layer w0.508: R3.2@73.165,54.705 IC1.43@77.93,54.705
  Bottom Layer w0.305: IC1.43@78.105,54.61 93.345,54.61 108.585,39.37 115.585,39.37 ; P15.4@116.855,38.1 115.585,39.37 ; P13.4@130.19,38.1 128.92,39.37 115.585,39.37
KEY_2: IC1.44 P13.6 P15.6 R4.2 | length 65.5
  Top Layer w0.508: R4.2@73.165,52.165 IC1.44@77.93,52.165
  Bottom Layer w0.305: IC1.44@78.105,52.07 93.345,52.07 108.585,36.83 115.57,36.83 ; P15.6@116.855,35.56 116.84,35.56 115.57,36.83 ; P13.6@130.19,35.56 128.92,36.83 115.57,36.83
KEY_3: IC1.45 P13.8 P15.8 R5.2 | length 65.5
  Top Layer w0.508: R5.2@73.165,49.625 IC1.45@77.93,49.625
  Bottom Layer w0.305: IC1.45@78.105,49.53 93.345,49.53 108.585,34.29 115.57,34.29 ; P15.8@116.855,33.02 116.84,33.02 115.57,34.29 ; P13.8@130.19,33.02 128.92,34.29 115.57,34.29
KEY_4: IC1.46 P13.10 P15.10 R6.2 | length 65.5
  Top Layer w0.508: R6.2@73.165,47.085 IC1.46@77.93,47.085
  Bottom Layer w0.305: IC1.46@78.105,46.99 93.345,46.99 108.585,31.75 115.585,31.75 ; P15.10@116.855,30.48 115.585,31.75 ; P13.10@130.19,30.48 128.92,31.75 115.585,31.75
KEY_5: IC1.47 P13.12 P15.12 R8.2 | length 65.5
  Top Layer w0.508: R8.2@73.165,44.545 IC1.47@77.93,44.545
  Bottom Layer w0.305: IC1.47@78.105,44.45 93.345,44.45 108.585,29.21 115.57,29.21 ; P15.12@116.855,27.94 116.84,27.94 115.57,29.21 ; P13.12@130.19,27.94 128.92,29.21 115.57,29.21